# Altium PCB PCB_Control_2021-08-06.pcbdoc (part 1 of 2)
Units mil, origin at the board's own origin, x right, y up, seen from the top; angles counter-clockwise.
Board outline 4897.2 x 3916.1 mil, 2 copper layers (Top Layer, Bottom Layer); 50 components, 74 nets, 337 pads, 66 vias.
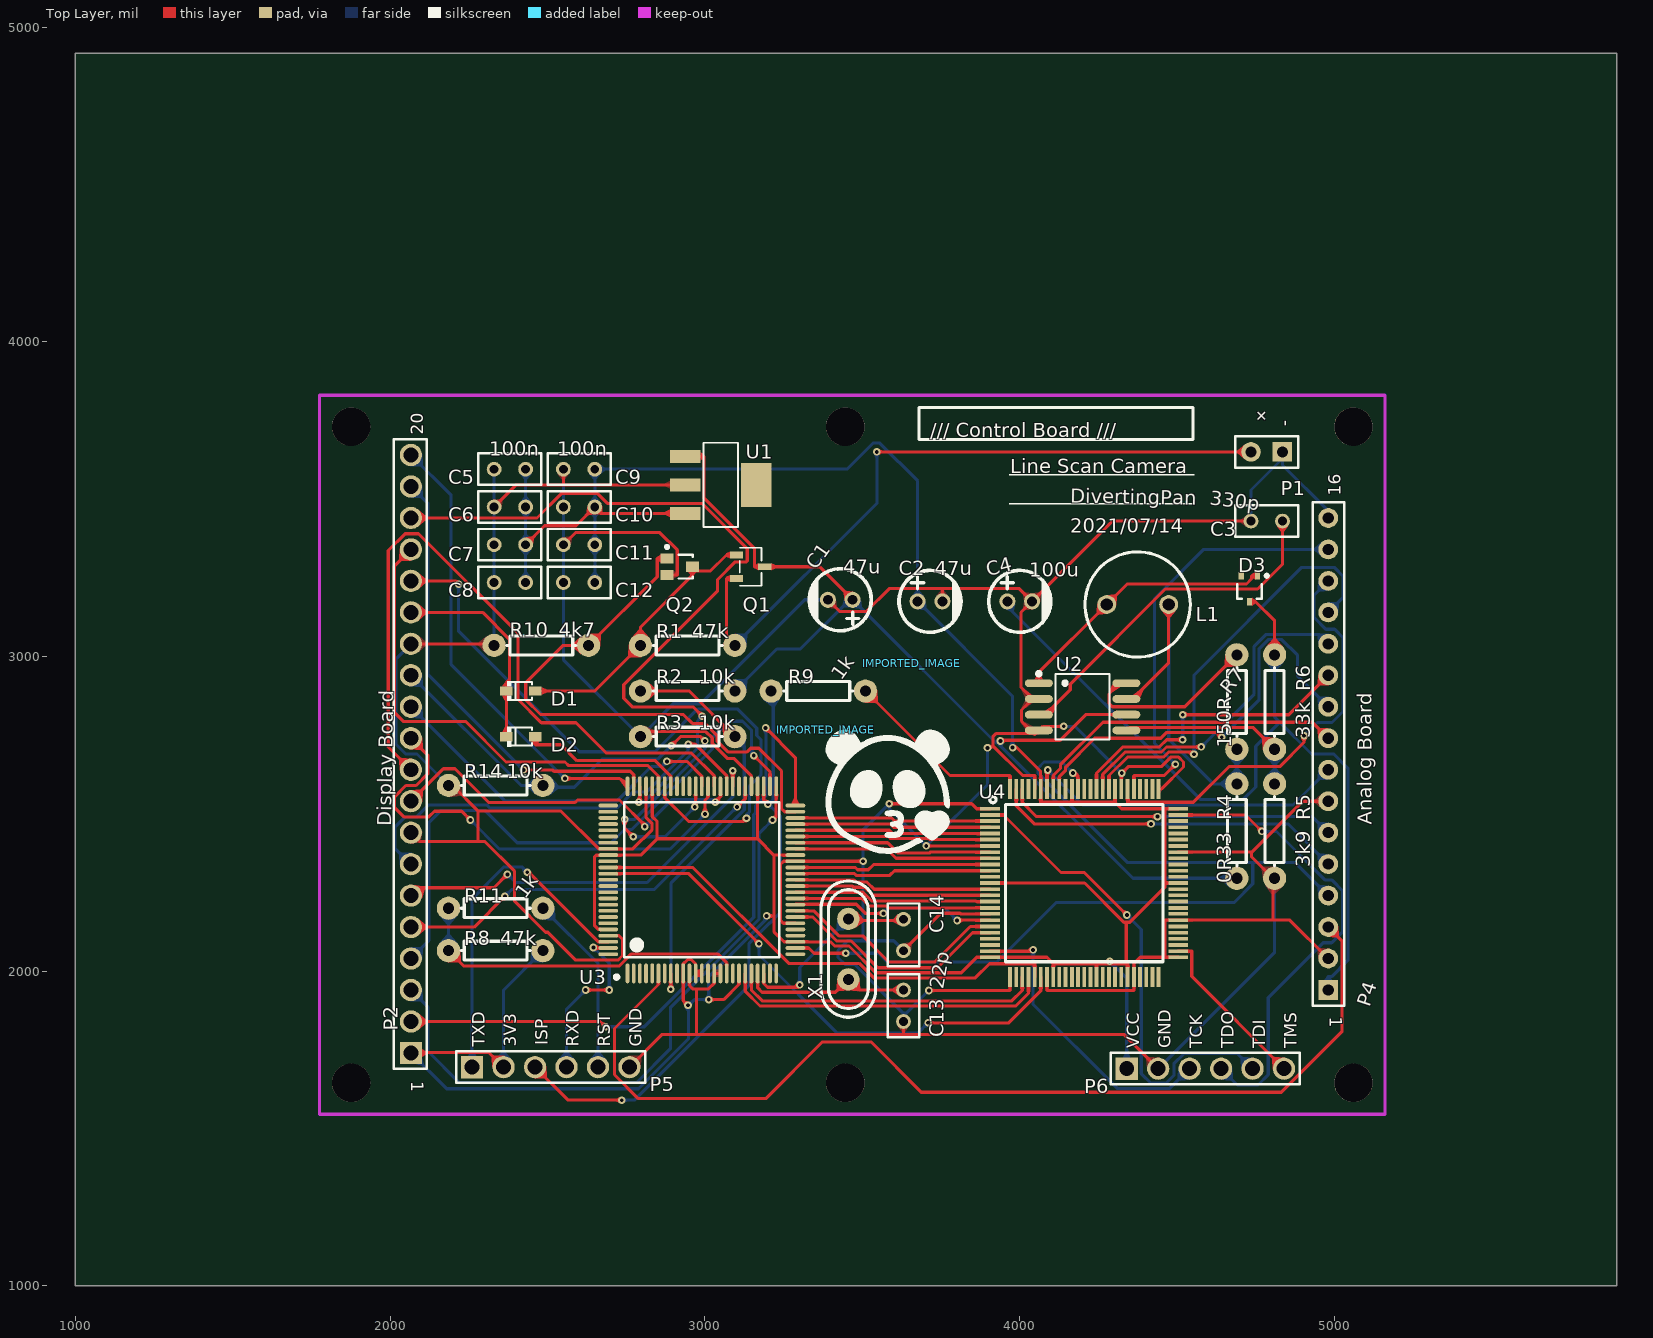
[diagram p0: Top Layer view]
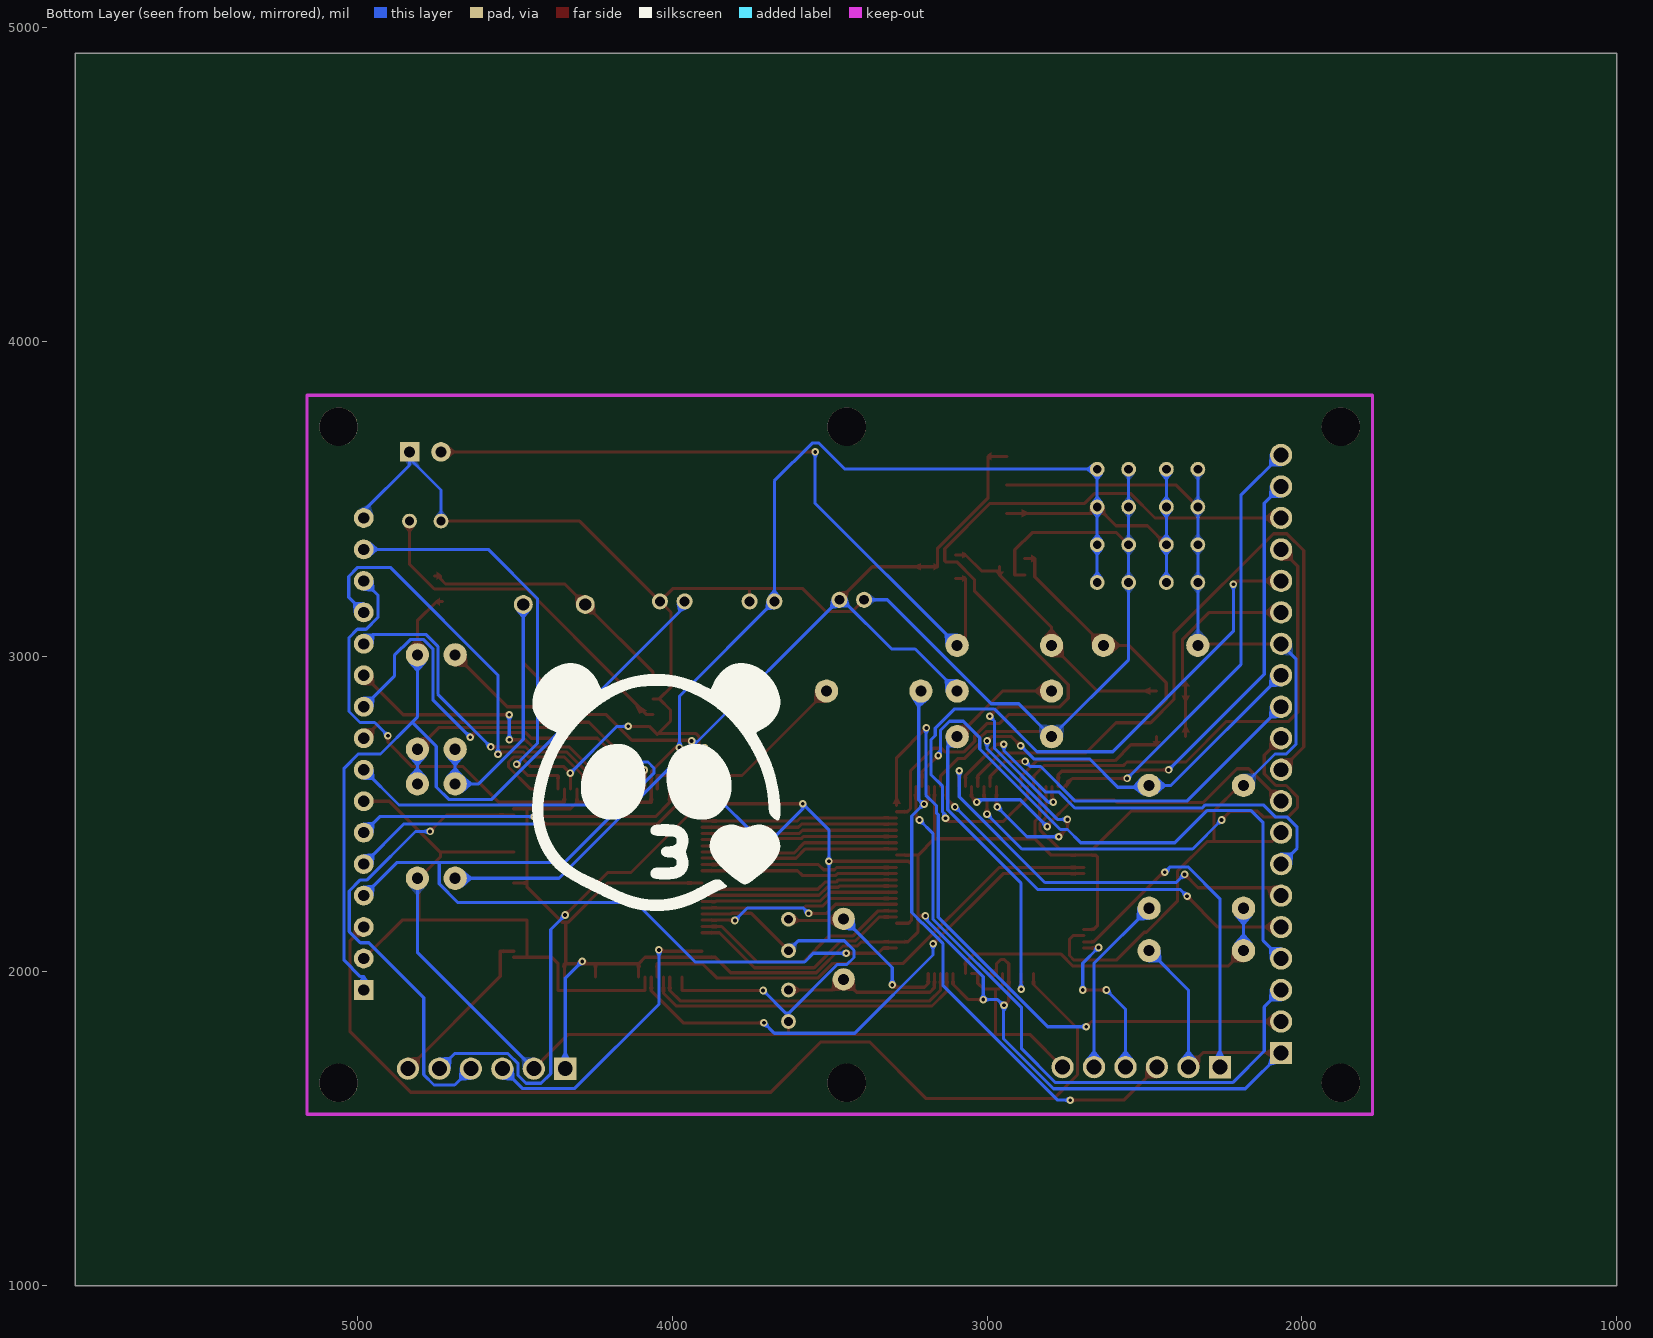
[diagram p1: Bottom Layer view, seen from below]

## Layer stack, top to bottom
Top Layer: signal copper (thickness not stored)
Dielectric: dielectric 12.6, FR-4, Dk 4.8
Bottom Layer: signal copper (thickness not stored)

## Board outline
5897.2,1000 1000,1000 1000,4916.1 5897.2,4916.1

## Components (designator, comment, footprint, x,y, rotation, side; value= is the part's Value field where it differs from the comment)
C1 "47u" CAP-TH_BD5.0-P2.00-D0.8-FD 3430.5,3180 r180 top
C2 "47u" CAP-TH_BD5.0-P2.00-D0.8-FD 3715.5,3175 r0 top
C3 "330p" RAD-0.1 4785.5,3430 r180 top
C4 "100u" CAP-TH_BD5.0-P2.00-D0.8-FD 4000.5,3175 r0 top
C5 "100n" RAD-0.1 2380.5,3595 r0 top
C6 "100n" RAD-0.1 2380.5,3475 r0 top
C7 "100n" RAD-0.1 2380.5,3355 r0 top
C8 "100n" RAD-0.1 2380.5,3235 r0 top
C9 "100n" RAD-0.1 2600.5,3595 r0 top
C10 "100n" RAD-0.1 2600.5,3475 r0 top
C11 "100n" RAD-0.1 2600.5,3355 r0 top
C12 "100n" RAD-0.1 2600.5,3235 r0 top
C13 "22p" RAD-0.1 3631.1,1890 r90 top
C14 "22p" RAD-0.1 3631.1,2115 r90 top
D1 "1SS352" SOD-323_L1.8-W1.3-LS2.5-RD 2415.5,2890 r0 top
D2 "1SS352" SOD-323_L1.8-W1.3-LS2.5-RD 2415.5,2745 r0 top
D3 "SB1003M3" -ONSC-MCPH-3_V 4730.5,3215 r270 top
IMPORTED_IMAGE "IMPORTED_IMAGE" IMPORTED_IMAGE 3657.32,2977.87 r0 top
IMPORTED_IMAGE "IMPORTED_IMAGE" IMPORTED_IMAGE 3384.02,2766.43 r0 top
L1 "100uH" IND-TH_BD8.5-P5.00-D0.6 4375.5,3165 r180 top
P1 "Battery" HDR-F-2.54_1X2 4785.5,3650 r180 top
P2 "Display Board" HDR-TH_20P-P2.54-V 2066.1,2690 r90 top
P4 "Analog Board" HDR-TH_16P-P2.54-V 4981.1,2690 r90 top
P5 "CN6BOX" HDR-TH_6P-P2.54-V 2510.5,1695 r0 top
P6 "CN6BOX" HDR-TH_6P-P2.54-V 4590.5,1690 r0 top
Q1 "NTR4101PT1G" SOT-23-3_L2.9-W1.6-P1.90-LS2.8-BR 3145.5,3285 r180 top
Q2 "RN1302" SOT-323-3_L2.0-W1.3-P1.30-LS2.1-BR 2920.5,3285 r180 top
R1 "47k" R_AXIAL-0.3 2945.5,3035 r180 top
R2 "10k" R_AXIAL-0.3 2945.5,2890 r0 top
R3 "10k" R_AXIAL-0.3 2945.5,2745 r0 top
R4 "0R33" R_AXIAL-0.3 4690.5,2445 r270 top
R5 "3k9" R_AXIAL-0.3 4810.5,2445 r270 top
R6 "33k" R_AXIAL-0.3 4810.5,2855 r270 top
R7 "150R" R_AXIAL-0.3 4690.5,2855 r90 top
R8 "47k" R_AXIAL-0.3 2335.5,2065 r180 top
R9 "1k" R_AXIAL-0.3 3360.5,2890 r180 top
R10 "4k7" R_AXIAL-0.3 2480.5,3035 r0 top
R11 "1k" R_AXIAL-0.3 2335.5,2200 r0 top
R14 "10k" R_AXIAL-0.3 2335.5,2590 r0 top
U1 "MCP1824S33" SOT-223_L6.5-W3.5-P2.30-LS7.0-BR 3050.5,3545 r180 top
U2 "NJM2374AM" SOIC-8_L5.3-W5.3-P1.27-LS8.0-BL 4200.5,2840 r270 top
U3 "LPC2368FBD100K" LQFP-100_L14.0-W14.0-P0.50-LS16.0-BL 2990.5,2290 r0 top
U4 "LC4256V-75T100C" TQFP100 4205.5,2280 r0 top
X1 "16M" HC-49S_L11.0-W4.4-P4.88 3456.1,2070 r90 top
? "" ? 5071.1,3315.05 r0 top
? "" ? 3468.6,3939.5 r0 top
? "" ? 1826.1,3943.9 r0 top
? "" ? 1700.67,2687.5 r0 top
? "" ? 1921.1,4027.05 r0 top
? "" ? 2611.1,3934.25 r0 top

## Footprints (in the part's own frame and the unit in brackets; to place one, negate y for a bottom-side part, rotate by r counter-clockwise, add the part's x,y. Pads: shape width x height; smd on the part's side, far side on the other; paste and mask are expansions set on the pad)
-ONSC-MCPH-3_V [mil]
  rect 24.5x16.5 smd: 1(-41,26) 2(-41,-26) 3(41,0)
  silkscreen extent -46,-39 32,60
CAP-TH_BD5.0-P2.00-D0.8-FD [mm]
  round 1.3 hole 0.8: 1(-1,0) 2(1,0)
  silkscreen extent -2.5,-2.5 2.5,2.5
HC-49S_L11.0-W4.4-P4.88 [mm]
  round 1.8 hole 0.9: 1(-2.44,0) 2(2.44,0)
  silkscreen extent -5.5,-2.2 5.5,2.2
HDR-F-2.54_1X2 [mil]
  rect 62x62 hole 35: 1(-50,0)
  round 62 hole 35: 2(50,0)
  silkscreen extent -100,-49 100,50
HDR-TH_6P-P2.54-V [mm]
  rect 1.8x1.8 hole 1.2: 1(-6.35,0)
  round 1.8 hole 1.2: 2(-3.81,0) 3(-1.27,0) 4(1.27,0) 5(3.81,0) 6(6.35,0)
  silkscreen extent -7.62,-1.27 7.62,1.27
HDR-TH_16P-P2.54-V [mm]
  rect 1.6x1.6 hole 0.9: 1(-19.05,0)
  round 1.6 hole 0.9: 2(-16.51,0) 3(-13.97,0) 4(-11.43,0) 5(-8.89,0) 6(-6.35,0) 7(-3.81,0) 8(-1.27,0) 9(1.27,0) 10(3.81,0) 11(6.35,0) 12(8.89,0) 13(11.43,0) 14(13.97,0) 15(16.51,0) 16(19.05,0)
  silkscreen extent -20.32,-1.27 20.32,1.27
HDR-TH_20P-P2.54-V [mm]
  rect 1.8x1.8 hole 1.2: 1(-24.13,0)
  round 1.8 hole 1.2: 2(-21.59,0) 3(-19.05,0) 4(-16.51,0) 5(-13.97,0) 6(-11.43,0) 7(-8.89,0) 8(-6.35,0) 9(-3.81,0) 10(-1.27,0) 11(1.27,0) 12(3.81,0) 13(6.35,0) 14(8.89,0) 15(11.43,0) 16(13.97,0) 17(16.51,0) 18(19.05,0) 19(21.59,0) 20(24.13,0)
  silkscreen extent -25.4,-1.27 25.4,1.4
IMPORTED_IMAGE [mil]
IND-TH_BD8.5-P5.00-D0.6 [mil]
  round 60 hole 39.37: 1(-98.43,0) 2(98.42,0)
  silkscreen extent -167,-167 167,167
LQFP-100_L14.0-W14.0-P0.50-LS16.0-BL [mm]
  oval 0.3x1.6 smd: 1(-6,-7.55) 2(-5.5,-7.55) 3(-5,-7.55) 4(-4.5,-7.55) 5(-4,-7.55) 6(-3.5,-7.55) 7(-3,-7.55) 8(-2.5,-7.55) 9(-2,-7.55) 10(-1.5,-7.55) 11(-1,-7.55) 12(-0.5,-7.55) 13(0,-7.55) 14(0.5,-7.55) 15(1,-7.55) 16(1.5,-7.55) 17(2,-7.55) 18(2.5,-7.55) 19(3,-7.55) 20(3.5,-7.55) 21(4,-7.55) 22(4.5,-7.55) 23(5,-7.55) 24(5.5,-7.55) 25(6,-7.55) 51(6,7.55) 52(5.5,7.55) 53(5,7.55) 54(4.5,7.55) 55(4,7.55) 56(3.5,7.55) 57(3,7.55) 58(2.5,7.55) 59(2,7.55) 60(1.5,7.55) 61(1,7.55) 62(0.5,7.55) 63(0,7.55) 64(-0.5,7.55) 65(-1,7.55) 66(-1.5,7.55) 67(-2,7.55) 68(-2.5,7.55) 69(-3,7.55) 70(-3.5,7.55) 71(-4,7.55) 72(-4.5,7.55) 73(-5,7.55) 74(-5.5,7.55) 75(-6,7.55)
  oval 1.6x0.3 smd: 26(7.55,-6) 27(7.55,-5.5) 28(7.55,-5) 29(7.55,-4.5) 30(7.55,-4) 31(7.55,-3.5) 32(7.55,-3) 33(7.55,-2.5) 34(7.55,-2) 35(7.55,-1.5) 36(7.55,-1) 37(7.55,-0.5) 38(7.55,0) 39(7.55,0.5) 40(7.55,1) 41(7.55,1.5) 42(7.55,2) 43(7.55,2.5) 44(7.55,3) 45(7.55,3.5) 46(7.55,4) 47(7.55,4.5) 48(7.55,5) 49(7.55,5.5) 50(7.55,6) 76(-7.55,6) 77(-7.55,5.5) 78(-7.55,5) 79(-7.55,4.5) 80(-7.55,4) 81(-7.55,3.5) 82(-7.55,3) 83(-7.55,2.5) 84(-7.55,2) 85(-7.55,1.5) 86(-7.55,1) 87(-7.55,0.5) 88(-7.55,0) 89(-7.55,-0.5) 90(-7.55,-1) 91(-7.55,-1.5) 92(-7.55,-2) 93(-7.55,-2.5) 94(-7.55,-3) 95(-7.55,-3.5) 96(-7.55,-4) 97(-7.55,-4.5) 98(-7.55,-5) 99(-7.55,-5.5) 100(-7.55,-6)
  silkscreen extent -7.03,-8 6.25,6.25
R_AXIAL-0.3 [mil]
  round 74 hole 35.4: 1(-150,0) 2(150,0)
  silkscreen extent -110,-30 110,30
RAD-0.1 [mil]
  round 47 hole 28: 1(-50,0) 2(50,0)
  silkscreen extent -100,-50 100,50
SOD-323_L1.8-W1.3-LS2.5-RD [mm]
  rect 1x0.75 smd: 1(-1.173,0) 2(1.173,0)
  silkscreen extent -1.08,-0.8 0.9,0.8
SOIC-8_L5.3-W5.3-P1.27-LS8.0-BL [mm]
  oval 0.63x2.25 smd: 1(-1.905,-3.53) 2(-0.635,-3.53) 3(0.635,-3.53) 4(1.905,-3.53) 5(1.905,3.53) 6(0.635,3.53) 7(-0.635,3.53) 8(-1.905,3.53)
  silkscreen extent -2.82,-3.68 2.64,2.18
SOT-23-3_L2.9-W1.6-P1.90-LS2.8-BR [mm]
  rect 1.07x0.532 smd: 1(1.135,-0.95) 2(1.135,0.95) 3(-1.135,0)
  silkscreen extent -0.88,-1.54 0.88,1.54
SOT-223_L6.5-W3.5-P2.30-LS7.0-BR [mm]
  rect 2.465x1.05 smd: 1(2.858,-2.3) 2(2.857,0) 3(2.857,2.3)
  rect 2.465x3.54 smd: 4(-2.857,0)
  silkscreen extent -1.4,-3.4 1.4,3.4
SOT-323-3_L2.0-W1.3-P1.30-LS2.1-BR [mil]
  rect 41.5x32.5 smd: 1(40,-26) 2(40,26) 3(-40,0)
  silkscreen extent -40,-68 45,37
TQFP100 [mil]
  rect 63x12 smd: 1(-299,236) 2(-299,216) 3(-299,197) 4(-299,177) 5(-299,157) 6(-299,138) 7(-299,118) 8(-299,98) 9(-299,79) 10(-299,59) 11(-299,39) 12(-299,20) 13(-299,0) 14(-299,-20) 15(-299,-39) 16(-299,-59) 17(-299,-79) 18(-299,-98) 19(-299,-118) 20(-299,-138) 21(-299,-158) 22(-299,-177) 23(-299,-197) 24(-299,-217) 25(-299,-236) 51(299,-236) 52(299,-217) 53(299,-197) 54(299,-177) 55(299,-158) 56(299,-138) 57(299,-118) 58(299,-98) 59(299,-79) 60(299,-59) 61(299,-39) 62(299,-20) 63(299,0) 64(299,20) 65(299,39) 66(299,59) 67(299,79) 68(299,98) 69(299,118) 70(299,138) 71(299,157) 72(299,177) 73(299,197) 74(299,216) 75(299,236)
  rect 12x63 smd: 26(-236,-299) 27(-216,-299) 28(-197,-299) 29(-177,-299) 30(-157,-299) 31(-138,-299) 32(-118,-299) 33(-98,-299) 34(-79,-299) 35(-59,-299) 36(-39,-299) 37(-20,-299) 38(0,-299) 39(20,-299) 40(39,-299) 41(59,-299) 42(79,-299) 43(98,-299) 44(118,-299) 45(138,-299) 46(158,-299) 47(177,-299) 48(197,-299) 49(217,-299) 50(236,-299) 76(236,299) 77(217,299) 78(197,299) 79(177,299) 80(158,299) 81(138,299) 82(118,299) 83(98,299) 84(79,299) 85(59,299) 86(39,299) 87(20,299) 88(0,299) 89(-20,299) 90(-39,299) 91(-59,299) 92(-79,299) 93(-98,299) 94(-118,299) 95(-138,299) 96(-157,299) 97(-177,299) 98(-197,299) 99(-216,299) 100(-236,299)
  silkscreen extent -300,-250 250,275
? [mil]

## Free pads (board coordinates)
  round 122.05 hole 122.05 unplated: ""(1876.1,1645) ""(1876.1,3730) ""(3446.1,1645) ""(3446.1,3730) ""(5061.1,1645) ""(5061.1,3730)

## Via types
v1: diameter 24.02, hole 12.01, Top Layer to Bottom Layer, 66 vias

## Nets (pads, with @x,y where several pads share a name; then routed paths per layer and width w, separated by ;. In a path a pad name is that pad's centre, name@x,y a point inside that pad or via, vN(x,y) a via of type N, cw(c..) or ccw(c..) an arc to the next point about the centre after c; other vN are vias at no path point)
D1_1: D1.1 D2.1 P2.15 | length 661.9
  Top Layer w10: P2.15@2066.1,3140 2293.89,3140 2378.92,3054.97 2378.92,2925.41 2369.34,2915.83 ; D2.1@2369.34,2745 D1.1@2369.34,2890 2369.3,2915.8
GND: C1.2 C2.2 C3.2 C4.2 C5.1 C6.1 C7.1 C8.1 C9.1 C10.1 C11.1 C12.1 C13.1 C14.1 P1.1 P2.8 P2.14 P4.2 P4.7 P4.16 P5.6 P6.2 Q2.2 R3.1 R5.2 R10.1 R14.1 U1.2 U2.2 U2.4 U3.11 U3.15 U3.16 U3.31 U3.41 U3.55 U3.72 U3.83 U3.97 U4.1 U4.7 U4.18 U4.26 U4.32 U4.46 U4.51 U4.57 U4.68 U4.76 U4.82 U4.96 | length 18788.4
  Top Layer w10: P2.8@2066.1,2440 2094.22,2411.88 2279.72,2411.88 ; P2.14@2066.1,3040 2325.5,3040 R10.1@2330.5,3035 ; R14.1@2185.5,2590 2198.16,2590 2279.72,2508.44 2279.72,2411.88 ; 2279.7,2508.4 2543,2508.4 2663,2388.4 U3.83@2693.26,2388.43 2771.2,2388.4 2832.4,2449.6 2832.4,2468.8 2813.4,2487.8 2813.4,2587.2 U3.72@2813.33,2587.24 ; C6.1@2330.5,3475 2400.5,3545 2550.5,3545 ; C11.1@2550.5,3355 2588.91,3393.41 2857.27,3393.41 2912.32,3338.36 2912.32,3259 Q2.2@2880.5,3259 ; C9.1@2550.5,3595 2550.5,3545 ; U3.97@2693.26,2112.83 2727.3,2112.8 2738.6,2101.4 2738.6,2049.6 2724,2034.9 2589.7,2034.9 2500.9,2123.7 2493.7,2123.7 2395.7,2221.6 2395.7,2317 2300.8,2411.9 2279.7,2411.9 ; P5.6@2760.5,1695 2864.63,1799.13 2973.17,1799.13 ; R3.1@2795.5,2745 2811.6,2761.1 3003.4,2761.1 3023.4,2741 3023.4,2724 3071.3,2676.1 3092.3,2676.1 3148,2620.5 U3.55@3147.98,2587.24 ; U1.2@2938,3545 2550.5,3545 ; U3.11@2951.13,1992.76 2951.1,1954 2961.8,1943.4 2973.2,1943.4 3011.5,1943.4 3029.9,1961.7 U3.15@3029.87,1992.76 U3.16@3049.56,1992.76 ; 2973.17,1943.38 2973.17,1799.13 ; U3.31@3287.74,2152.2 3249.7,2152.2 3240.3,2161.6 3240.3,2338.6 3250.7,2349.1 U3.41@3287.74,2349.06 v1(3502.86,2349.06) ; C1.2@3391.13,3180 3427.93,3143.2 3513.78,3143.2 3586.13,3215.55 3754.87,3215.55 ; v1(3586.11,2532.06) 3847.87,2532.06 3863.93,2516 ; C13.1@3631.1,1840 3631.1,1799.13 ; C14.1@3631.1,2065 3750.1,2184 3811.3,2184 3813.2,2182 U4.18@3906.5,2182 ; v1(3703.53,2398) U4.7@3906.5,2398 ; v1(3711.95,1938.43) 3969.5,1938.43 ; C2.2@3754.87,3175 3754.87,3215.55 ; 3863.9,2516 U4.1@3906.5,2516 ; v1(3898.15,2709.21) 3908.22,2709.21 3915.29,2716.28 ; 3969.5,1938.4 U4.26@3969.5,1981 ; C4.2@4039.87,3175 4004.7,3139.9 4004.7,2901.8 U2.2@4041.5,2865 ; U4.96@4048.5,2579 4048.5,2621.6 ; 4048.5,2621.57 4010,2621.57 3915.29,2716.28 ; U2.2@4061.52,2865 U2.2@4041.51,2865 ; 4087.5,1938.4 U4.32@4087.5,1981 ; 4087.5,1938.43 4363.5,1938.43 ; v1(4140.5,2777.81) 4074.3,2777.8 U2.4@4061.52,2765 4048.5,2752 ; U4.82@4323.5,2579 4323.5,2628 v1(4324.8,2629.27) 4345.3,2649.8 4450.1,2649.8 4480.4,2680.1 4505.4,2680.1 4521.1,2664.4 4521.1,2648.7 4451.5,2579 U4.76@4441.5,2579 ; 4363.5,1938.4 U4.46@4363.5,1981 4363.5,2023.6 ; 4363.5,2023.57 4383.93,2044 4461.93,2044 4461.93,2162 ; P6.2@4440.5,1690 4331.37,1799.13 3631.1,1799.13 ; 4461.9,2044 U4.51@4504.5,2044 ; 4461.9,2162 U4.57@4487.2,2162 ; U4.57@4487.24,2162 U4.57@4504.5,2162 4805.3,2162 ; U4.68@4504.5,2378 4737.5,2378 ; C3.2@4735.5,3430 4294.87,3430 C4.2@4039.87,3175 3999.32,3215.55 3754.87,3215.55 ; R5.2@4810.5,2295 R5.2@4805.26,2295 ; P4.2@4981.1,2040 4859.1,2162 4805.26,2162 R5.2@4805.26,2295 ; P4.7@4981.1,2540 4899.48,2540 4737.48,2378 ; 2973.17,1799.13 3631.1,1799.13 ; 3915.3,2716.3 3915.3,2745.1 3924.9,2754.7 4045.8,2754.7 4048.5,2752 ; U2.2@4041.5,2865 4006.1,2829.6 4006.1,2794.3 4048.5,2752 ; 4737.48,2378 4737.48,2362.78 R5.2@4805.26,2295
  Bottom Layer w10: P2.14@2066.1,3040 2018.96,2992.86 2018.96,2720.22 2049.18,2690 2085.5,2690 R14.1@2185.5,2590 ; R10.1@2330.5,3035 C8.1@2330.5,3235 C7.1@2330.5,3355 C6.1@2330.5,3475 C5.1@2330.5,3595 ; C9.1@2550.5,3595 C10.1@2550.5,3475 C11.1@2550.5,3355 C12.1@2550.5,3235 2550.5,2990 R3.1@2795.5,2745 2899.9,2849.4 2986.91,2849.4 3317.51,3180 C1.2@3391.13,3180 ; C13.1@3631.1,1840 3631.1,1866.16 ; C14.1@3631.1,2065 3599.79,2096.31 3502.86,2096.31 ; v1(3711.95,1938.43) 3639.68,1866.16 3631.1,1866.16 ; v1(3898.15,2709.21) 3898.15,2592.62 v1(3703.53,2398) 3586.11,2515.42 v1(3586.11,2532.06) 3502.86,2448.81 v1(3502.86,2349.06) 3502.86,2096.31 ; v1(4140.5,2777.81) 4176.26,2777.81 v1(4324.8,2629.27) ; P6.2@4440.5,1690 4810.5,2060 R5.2@4810.5,2295 ; C3.2@4735.5,3430 4735.5,3529 4835.5,3629 4835.5,3607.9 ; 4835.5,3607.93 4981.1,3462.33 P4.16@4981.1,3440 ; P1.1@4835.5,3628.97 P1.1@4835.5,3650 ; 3502.86,2096.31 3453.6,2096.31 3423.31,2066.02 3423.31,2043.47 3445.85,2020.93 3476.33,2020.93 3631.1,1866.16
P1_2: P1.2 Q1.2 R1.1 | length 2246.6
  Top Layer w10: R1.1@3095.5,3035 3068.69,3061.81 3068.69,3247.6 Q1.2@3100.82,3247.6 ; v1(3546.61,3650) P1.2@4735.5,3650
  Bottom Layer w10: R1.1@3095.5,3035 3546.61,3486.11 v1(3546.61,3650)
P5_5: P5.5 R11.2 | length 577.5
  Bottom Layer w10: R11.2@2485.5,2200 2660.5,2025 P5.5@2660.5,1695
Q1_1: D1.2 Q1.1 Q2.3 R1.2 | length 873.6
  Top Layer w10: D1.2@2461.66,2890 2650.5,2890 R1.2@2795.5,3035 2795.5,3092.68 2960.5,3257.68 2960.5,3271.3 3017.6,3271.3 3068.7,3322.4 Q1.1@3100.82,3322.4 ; Q2.3@2960.5,3271.34 Q2.3@2960.5,3285
Q1_3: C1.1 Q1.3 R2.2 R4.2 U1.1 U2.6 | length 3358.5
  Top Layer w10: U1.1@2938,3635.5 2997.6,3635.5 ; 2997.59,3635.55 2997.59,3502.45 3158.06,3341.98 3158.06,3285 ; 3158.1,3285 Q1.3@3174.1,3285 ; Q1.3@3174.13,3285 Q1.3@3190.19,3285 3364.9,3285 C1.1@3469.87,3180 ; v1(3939.22,2731.22) 3941.6,2733.6 4128.9,2733.6 4210.3,2815 U2.6@4339.48,2815
  Bottom Layer w10: R2.2@3095.5,2890 3229.07,3023.57 3303.64,3023.57 3460.07,3180 C1.1@3469.87,3180 3923.57,2726.3 v1@3934.3,2726.3 ; v1(3939.22,2731.22) v1@3934.3,2726.3 ; R4.2@4690.5,2295 4360.6,2295 3934.3,2721.3 v1@3934.3,2726.3
R6_1: C4.1 D3.3 P4.1 R6.1 | length 2761.5
  Top Layer w10: D3.3@4730.5,3174 4749.8,3174 4810.5,3113.32 R6.1@4810.5,3005
  Bottom Layer w10: C4.1@3961.13,3175 3961.13,3158.72 4574.07,2545.78 4711.27,2545.78 4750.51,2585.02 4750.51,2714.25 4826.92,2790.66 ; R6.1@4810.5,3005 4810.5,2807.08 4826.92,2790.66 ; P4.1@4981.1,1940 4981.1,1982.6 ; 4981.09,1982.57 4991.73,1982.57 5043.34,2034.18 5043.34,2645.05 4998.39,2690 4927.58,2690 4826.92,2790.66
U2_1: D3.1 L1.2 U2.1 | length 862.1
  Top Layer w10: U2.1@4061.52,2915 4061.5,2949.4 L1.2@4277.08,3165 4342.32,3230.24 4721.08,3230.24 4737.18,3246.34 4737.18,3256 D3.1@4756.5,3256
U2_3: C3.1 U2.3 | length 1119.3
  Top Layer w10: U2.3@4061.52,2815 4082.1,2815 4161.2,2894.2 4161.2,2911.7 4463.6,3214.1 4756.7,3214.1 4835.5,3293 C3.1@4835.5,3430
U2_5: R5.1 R6.2 U2.5 | length 613.8
  Top Layer w10: U2.5@4339.48,2765 4349,2774.6 4740.9,2774.6 R6.2@4810.5,2705
  Bottom Layer w10: R5.1@4810.5,2595 R6.2@4810.5,2705
U2_7: L1.1 R4.1 R7.1 U2.7 | length 1180.7
  Top Layer w10: U2.7@4339.48,2865 4359.3,2865 4473.9,2979.6 L1.1@4473.93,3165
  Bottom Layer w10: L1.1@4473.93,3165 4473.93,2736.97 4615.9,2595 R4.1@4690.5,2595 R7.1@4690.5,2705
U2_8: R7.2 U2.8 | length 578.4
  Top Layer w10: U2.8@4339.48,2915 4318.7,2915 4284.1,2880.4 4284.1,2851 4295.1,2840 4525.5,2840 R7.2@4690.5,3005
U3_6: P4.3 U3.6 | length 3293.7
  Top Layer w10: U3.6@2852.7,1992.76 2852.7,1957.7 2712.8,1817.8 2712.8,1671.1 2788.9,1595 3193.8,1595 3373.8,1775 3527.9,1775 3687.9,1615 4832,1615 5024.2,1807.2 5024.2,2096.9 P4.3@4981.1,2140
U3_8: R2.1 R3.2 U3.8 | length 1322.7
  Top Layer w10: R2.1@2795.5,2890 2950.5,2890 R3.2@3095.5,2745 ; v1(2892.08,1942.13) U3.8@2892.07,1992.76
  Bottom Layer w10: v1(2892.08,1942.13) 2892.08,2278.91 3125.49,2512.32 3125.49,2715.01 R3.2@3095.5,2745
U3_17: R8.2 R11.1 U3.17 | length 1100
  Top Layer w10: R8.2@2185.5,2065 2234.2,2016.3 2728.1,2016.3 2766.5,2054.7 3040.8,2054.7 3069.2,2026.2 U3.17@3069.24,1992.76
  Bottom Layer w10: R8.2@2185.5,2065 R11.1@2185.5,2200
U3_20: U3.20 U4.29 | length 1044.2
  Top Layer w10: U3.20@3128.3,1992.76 3128.3,1936.4 3175.5,1889.2 3987.9,1889.2 4028.5,1929.8 U4.29@4028.5,1981
U3_21: U3.21 U4.28 | length 984
  Top Layer w10: U3.21@3147.98,1992.76 3148,1940 3182.7,1905.3 3975.4,1905.3 4008.5,1938.4 U4.28@4008.5,1981
U3_27: P4.4 U3.27 U4.89 | length 2936.4
  Top Layer w10: U3.27@3287.74,2073.46 3330.3,2073.5 3347.1,2056.7 v1(3447.99,2056.69) ; v1@4169.65,2629.64 4177.72,2621.57 4185.5,2621.57 ; U4.89@4185.5,2579 4185.5,2621.6
  Bottom Layer w10: v1(3447.99,2056.69) 3552.51,2056.69 3580.24,2028.96 3927.5,2028.96 4116.05,2217.51 4681.39,2217.51 4741.07,2277.19 4741.07,2344.89 ; v1@4169.65,2629.64 4134.94,2664.35 4077.94,2664.35 4059.22,2645.63 4059.22,2628.97 4343.3,2344.89 4741.07,2344.89 ; P4.4@4981.1,2240 4876.21,2344.89 4741.07,2344.89
  other v1: 4169.65,2629.64
U3_32: U3.32 U4.21 | length 731.6
  Top Layer w10: U3.32@3287.74,2171.89 3343.4,2171.9 3419.4,2095.9 3464.8,2095.9 3549.8,2010.8 3739.4,2010.8 3850.6,2122 U4.21@3906.5,2122
U3_33: U3.33 U4.20 | length 733.1
  Top Layer w10: U3.33@3287.74,2191.57 3346.5,2191.6 3426.1,2112 3502,2112 3585,2028.9 3730.8,2028.9 3843.9,2142 U4.20@3906.5,2142
U3_34: U3.34 U4.19 | length 655.4
  Top Layer w10: U3.34@3287.74,2211.26 3289,2212.6 3481,2212.6 3510,2183.5 v1(3567.5,2183.53) ; v1(3801.68,2160.9) 3802.8,2162 U4.19@3906.5,2162
  Bottom Layer w10: v1(3567.5,2183.53) 3584.66,2200.69 3761.89,2200.69 v1(3801.68,2160.9)
U3_35: U3.35 U4.17 | length 631.2
  Top Layer w10: U3.35@3287.74,2230.94 3499,2230.9 3523.3,2206.6 3577.1,2206.6 3582.7,2201 U4.17@3906.5,2201
U3_36: U3.36 U4.16 | length 631.1
  Top Layer w10: U3.36@3287.74,2250.63 3502.1,2250.6 3530,2222.7 3862.2,2222.7 3863.9,2221 U4.16@3906.5,2221
U3_37: U3.37 U4.15 | length 630.9
  Top Layer w10: U3.37@3287.74,2270.32 3469.7,2270.3 3473.3,2266.7 3508.7,2266.7 3534.5,2241 U4.15@3906.5,2241
U3_38: U3.38 U4.14 | length 631.2
  Top Layer w10: U3.38@3287.74,2290 3472.8,2290 3480,2282.8 3515.4,2282.8 3538.2,2260 U4.14@3906.5,2260
U3_39: U3.39 U4.11 | length 627.1
  Top Layer w10: U3.39@3287.74,2309.69 3475.8,2309.7 3481.2,2304.3 3587.8,2304.3 3602.6,2319 U4.11@3906.5,2319
U3_40: U3.40 U4.10 | length 628.7
  Top Layer w10: U3.40@3287.74,2329.37 3478.9,2329.4 3486.1,2322.2 3519.6,2322.2 3536.4,2339 U4.10@3906.5,2339
U3_43: U3.43 U4.9 | length 631.2
  Top Layer w10: U3.43@3287.74,2388.43 3577.7,2388.4 3607.3,2358.8 3863.8,2358.8 3863.9,2359 U4.9@3906.5,2359
U3_44: U3.44 U4.8 | length 633.8
  Top Layer w10: U3.44@3287.74,2408.11 3580.8,2408.1 3614,2374.9 3713.1,2374.9 3716.2,2378 U4.8@3906.5,2378
U3_45: U3.45 U4.6 | length 622.9
  Top Layer w10: U3.45@3287.74,2427.8 3583.9,2427.8 3590.6,2421.1 3713.1,2421.1 3716.2,2418 U4.6@3906.5,2418
U3_46: U3.46 U4.5 | length 623.2
  Top Layer w10: U3.46@3287.74,2447.48 3587,2447.5 3597.3,2437.2 3863.8,2437.2 3863.9,2437 U4.5@3906.5,2437
U3_47: U3.47 U4.4 | length 623
  Top Layer w10: U3.47@3287.74,2467.17 3590.1,2467.2 3600.3,2457 U4.4@3906.5,2457
U3_48: U3.48 U4.3 | length 622.9
  Top Layer w10: U3.48@3287.7,2486.9 3593.2,2486.9 3603,2477 U4.3@3906.5,2477
U3_49: Q2.1 R10.2 U3.49 | length 1794.3
  Top Layer w10: Q2.1@2880.5,3311 2848.7,3311 2848.68,3253.18 R10.2@2630.5,3035 2550.1,3035 2430.9,2915.8 2430.9,2862.6 2477.9,2815.6 2931.8,2815.6 2960.3,2787.1 3000.1,2787.1 3039.5,2747.7 3039.5,2730.6 3073.4,2696.7 3134.5,2696.7 3145.9,2708.1 3171.9,2708.1 3243.7,2636.4 3243.7,2516.5 3253.7,2506.5 U3.49@3287.74,2506.54
U3_50: P2.2 U3.50 | length 2145
  Top Layer w10: P2.2@2066.1,1840 2668.62,1840 v1(2685.49,1823.13) ; v1(3193.11,2772.98) 3287.7,2678.3 U3.50@3287.74,2526.22
  Bottom Layer w10: v1(2685.49,1823.13) 2807.3,1823.13 3155.45,2171.28 3155.45,2496.76 3161.54,2502.85 3161.54,2526.1 3194.61,2559.17 3194.61,2771.48 v1(3193.11,2772.98)
U3_51: P2.3 U3.51 | length 2046.3
  Top Layer w10: v1(3214.98,2480.16) 3226.7,2491.9 U3.51@3226.72,2587.24
  Bottom Layer w10: P2.3@2066.1,1940 2119.59,1886.51 2119.59,1746.18 2220.11,1645.66 2783.03,1645.66 2890.43,1753.06 2890.43,1883.49 3172.64,2165.7 3172.64,2437.82 v1(3214.98,2480.16)
U3_52: P2.4 U3.52 | length 1933.5
  Top Layer w10: v1(3155.43,2685.07) 3207,2633.5 U3.52@3207.04,2587.24
  Bottom Layer w10: P2.4@2066.1,2040 2123.12,2097.02 2123.12,2471.74 2161.38,2510 2301.91,2510 2404.1,2407.81 2702.54,2407.81 2744.81,2450.08 2767.57,2450.08 3023.43,2705.94 3023.43,2741.11 3076.23,2793.91 3119.64,2793.91 3148.77,2764.78 3148.77,2691.73 v1(3155.43,2685.07)
U3_53: P5.3 R9.2 U3.53 | length 1941
  Top Layer w10: P5.3@2460.5,1695 2565.5,1590 v1(2736.1,1590) ; U3.53@3187.35,2587.24 3187.4,2543.6 v1(3200.34,2530.63)
  Bottom Layer w10: v1(2736.1,1590) 2775.93,1590 3140.62,1954.69 3140.62,2088.16 3204.71,2152.25 3205.87,2152.25 3239.87,2186.25 3239.87,2492.94 v1@3203.18,2529.63 ; v1(3200.34,2530.63) 3201.34,2529.63 v1@3203.18,2529.63 ; R9.2@3210.5,2890 3217.48,2883.02 3217.48,2543.93 v1@3203.18,2529.63
U3_56: P2.5 U3.56 | length 1270.5
  Top Layer w10: P2.5@2066.1,2140 2266.76,2140 v1(2364.69,2237.93) ; v1(3102.41,2521.89) 3128.3,2547.8 U3.56@3128.3,2587.24
  Bottom Layer w10: v1(2364.69,2237.93) 2386.06,2259.3 2839.82,2259.3 v1(3102.41,2521.89)
U3_58: P2.6 U3.58 | length 1306.9
  Top Layer w10: P2.6@2066.1,2240 2091.1,2265 2330.28,2265 v1(2372.66,2307.38) ; U3.58@3088.93,2587.24 v1(3088.93,2636.81)
  Bottom Layer w10: v1(2372.66,2307.38) 2398.62,2281.42 2816.48,2281.42 3088.93,2553.87 v1(3088.93,2636.81)
U3_59: P2.7 U3.59 | length 1396.3
  Top Layer w10: v1(2947.02,2720.93) 2969.3,2720.9 3069.2,2621 U3.59@3069.24,2587.24
  Bottom Layer w10: P2.7@2066.1,2340 2015.14,2390.96 2015.14,2456.99 2048.15,2490 2084.57,2490 2122.73,2528.16 2306.51,2528.16 2316.14,2518.53 2721.18,2518.53 2772.13,2569.48 2815.42,2569.48 2947.02,2701.08 v1(2947.02,2720.93)
U3_60: P2.9 U3.60 | length 1189.6
  Top Layer w10: P2.9@2066.1,2540 2169.09,2642.99 2206.06,2642.99 2312.75,2536.3 2587.83,2536.3 2595.23,2543.7 2728.92,2543.7 2809.35,2463.27 v1(2809.35,2459.21) ; v1(3033.14,2537.31) 3049.6,2553.7 U3.60@3049.56,2587.24
  Bottom Layer w10: v1(2809.35,2459.21) 2894.84,2544.7 3025.75,2544.7 v1(3033.14,2537.31)
U3_61: P2.10 U3.61 | length 2259.6
  Top Layer w10: P2.10@2066.1,2640 1993.9,2712.2 1993.9,3336.5 2047.5,3390 2090,3390 2406.6,3073.4 2406.6,2863.3 2480.5,2789.4 2590.7,2789.4 2687,2693.1 2957.3,2693.1 3029.9,2620.5 U3.61@3029.87,2587.24
U3_62: P2.11 U3.62 | length 1499
  Top Layer w10: P2.11@2066.1,2740 2119.59,2686.51 2119.59,2627.09 2082.5,2590 2050.16,2590 2014.35,2554.19 2014.35,2519.39 2043.74,2490 2122.76,2490 2140.84,2508.08 2227.37,2508.08 v1(2255.24,2480.21) ; v1(3000.56,2498.94) 3000.6,2543.4 3010.2,2553 U3.62@3010.19,2587.24
  Bottom Layer w10: v1(2255.24,2480.21) 2347.22,2388.23 2889.85,2388.23 v1(3000.56,2498.94)
U3_63: P2.12 U3.63 | length 1152.4
  Top Layer w10: v1(2879.54,2666.25) 2943.7,2666.2 2990.5,2619.5 U3.63@2990.5,2587.24
  Bottom Layer w10: P2.12@2066.1,2840 2365.82,2540.28 2720.17,2540.28 2830.05,2650.16 2863.45,2650.16 v1(2879.54,2666.25)
U3_64: P2.13 R14.2 U3.64 | length 1895.5
  Top Layer w10: v1(2744.98,2482.09) 2744.98,2454.43 v1(2772.42,2426.99) ; v1(2893.86,2716.17) 2922.69,2745 2986.79,2745 v1(3000.35,2731.44) ; v1(2967.92,2521.62) 2970.8,2524.5 U3.64@2970.82,2587.24
  Bottom Layer w10: P2.13@2066.1,2940 2416.1,2590 R14.2@2485.5,2590 2491.23,2584.27 2585,2584.27 2675.02,2674.29 2851.98,2674.29 v1(2893.86,2716.17) ; v1(2744.98,2482.09) 2776.82,2482.09 3000.35,2705.62 v1(3000.35,2731.44) ; v1(2772.42,2426.99) 2873.29,2426.99 v1(2967.92,2521.62)
U3_68: D2.2 U3.68 | length 529.7
  Top Layer w10: D2.2@2461.66,2745 2461.7,2719.2 2543.3,2719.2 2593.4,2669 2842.3,2669 2892.1,2619.3 U3.68@2892.07,2587.24
U3_69: P2.16 U3.69 | length 2135.2
  Top Layer w10: P2.16@2066.1,3240 2207.34,3240 v1(2217.69,3229.65) ; U3.69@2872.39,2587.24 2872.4,2551.5 2948,2475.9 3122.4,2475.9 v1(3132.36,2485.78)
  Bottom Layer w10: v1(2217.69,3229.65) 2217.69,3079.82 2600.59,2696.92 2841.61,2696.92 2978,2833.31 3103.11,2833.31 3164.86,2771.56 3164.86,2748.8 3178.52,2735.14 3178.52,2623.95 3141.58,2587.01 3141.58,2505.65 3132.36,2496.43 v1(3132.36,2485.78)
U3_70: P2.17 U3.70 | length 1495.8
  Top Layer w10: P2.17@2066.1,3340 2012.9,3286.8 2012.9,2822.5 2041.9,2793.5 2239.6,2793.5 2368.4,2664.6 2555.9,2664.6 2567.6,2652.9 2819.4,2652.9 2852.7,2619.6 U3.70@2852.7,2587.24
U3_73: P2.18 U3.73 | length 2522.5
  Top Layer w10: P2.18@2066.1,3440 2466.6,3440 2543.84,3517.24 2659.24,3517.24 2690.29,3486.19 2991.1,3486.19 3134.84,3342.45 3134.84,3303.38 3131.91,3300.45 3096.84,3300.45 3040.81,3244.42 3040.81,3208.32 2742.36,2909.87 2742.36,2866.52 2769.11,2839.77 2962.5,2839.77 v1(2992.04,2810.23) ; v1(2790.32,2536.97) 2793.6,2540.3 U3.73@2793.65,2587.24
  Bottom Layer w10: v1(2790.32,2536.97) 2805.67,2536.97 2976.75,2708.05 2976.75,2794.94 v1(2992.04,2810.23)
U3_74: P2.19 U3.74 | length 1442.6
  Top Layer w10: v1(2423.4,2639.49) 2516.1,2639.5 2520.2,2635.3 2763.1,2635.3 2774,2624.5 U3.74@2773.96,2587.24
  Bottom Layer w10: P2.19@2066.1,3540 2119.59,3486.51 2119.59,2943.3 v1(2423.4,2639.49)
U3_75: P2.20 U3.75 | length 1439.7
  Top Layer w10: v1(2555.27,2612.24) 2729.3,2612.2 U3.75@2754.28,2587.24
  Bottom Layer w10: P2.20@2066.1,3640 2193.71,3512.39 2193.71,2973.8 v1(2555.27,2612.24)
U3_86: U3.86 U4.30 | length 1561.8
  Top Layer w10: U3.86@2693.26,2329.37 2962.2,2329.4 3266.9,2024.7 3490.4,2024.7 3536.5,1978.6 3859.7,1978.6 3904.6,2023.6 4048.5,2023.6 U4.30@4048.5,1981
U3_87: U3.87 U4.31 | length 1704.6
  Top Layer w10: U3.87@2693.26,2309.69 2949.3,2309.7 v1(3172.04,2086.92) ; v1(3709.27,1835.74) 3966.1,1835.7 4067.5,1937.2 U4.31@4067.5,1981
  Bottom Layer w10: v1(3172.04,2086.92) 3172.04,2051.19 3420.47,1802.76 3676.29,1802.76 v1(3709.27,1835.74)
U3_98: P5.1 U3.98 | length 1108.3
  Top Layer w10: v1(2435.66,2314.09) 2440.3,2314.1 2661.2,2093.1 U3.98@2693.3,2093.1
  Bottom Layer w10: P5.1@2260.5,1695 2260.5,2229.8 2362,2331.3 2418.4,2331.3 v1(2435.66,2314.09)
U3_99: P5.4 U3.99 | length 548.6
  Top Layer w10: v1(2621.1,1940) v1(2696.1,1940) ; v1(2646.1,2075) 2647.6,2073.5 U3.99@2693.26,2073.46
  Bottom Layer w10: P5.4@2560.5,1695 2560.5,1879.4 v1(2621.1,1940) ; v1(2646.1,2075) 2696.1,2025 v1(2696.1,1940)
U4_2: P6.5 U4.2 | length 1536.2
  Top Layer w10: U4.2@3906.5,2496 3949.1,2496 ; 3949.07,2496 4131.68,2313.39 4206.01,2313.39 v1(4341.06,2178.34)
  Bottom Layer w10: v1(4341.06,2178.34) 4387.01,2132.39 4387.01,1674.39 4417.91,1643.49 4465.52,1643.49 4490.5,1668.47 4490.5,1705.77 4522.53,1737.8 4692.7,1737.8 P6.5@4740.5,1690
U4_24: P6.3 U4.24 | length 945.2
  Top Layer w10: U4.24@3906.5,2063 4038.7,2063 v1(4042.95,2067.29)
  Bottom Layer w10: v1(4042.95,2067.29) 4042.95,1894.53 4310.08,1627.4 4477.9,1627.4 P6.3@4540.5,1690
U4_52: P6.6 U4.52 | length 537.1
  Top Layer w10: U4.52@4504.5,2063 4547.1,2063 ; 4547.07,2063 4547.07,1983.43 P6.6@4840.5,1690
U4_74: P6.4 U4.74 | length 1504.8
  Top Layer w10: U4.74@4504.5,2496 4718.2,2496 v1(4770.34,2443.82)
  Bottom Layer w10: P6.4@4640.5,1690 4692.2,1638.3 4757.56,1638.3 4790.5,1671.24 4790.5,1915.33 4965.17,2090 4991.82,2090 5027.25,2125.43 5027.25,2254.5 4991.75,2290 4970.44,2290 4816.62,2443.82 v1(4770.34,2443.82)
U4_80: P4.15 U4.80 | length 1360.3
  Top Layer w10: U4.80@4363.5,2579 4363.5,2621.6 ; 4363.5,2621.57 4459.98,2621.57 v1@4495.45,2657.04
  Bottom Layer w10: v1@4495.45,2657.04 4428.79,2723.7 4428.79,3183.25 4585.54,3340 P4.15@4981.1,3340
  other v1: 4495.45,2657.04
U4_81: P4.14 U4.81 | length 1346.6
  Top Layer w10: 4343.5,2536.4 U4.81@4343.5,2579 ; 4343.5,2536.43 4551.89,2536.43 4665.46,2650 4827.18,2650 4904.04,2726.86 v1(4904.04,2747.68)
  Bottom Layer w10: v1(4904.04,2747.68) 4946.36,2790 4992.85,2790 5027.72,2824.87 5027.72,3059.73 5001.18,3086.27 4973.28,3086.27 4936.08,3123.47 4936.08,3194.98 P4.14@4981.1,3240
U4_84: P4.13 U4.84 | length 1359.9
  Top Layer w10: U4.84@4284.5,2579 4284.5,2621.6 4343.02,2680.13 4457.64,2680.13 4473.73,2696.22 4547.31,2696.22 v1(4554.48,2689.05)
  Bottom Layer w10: v1(4554.48,2689.05) 4554.48,2940.46 4896.99,3282.97 4999.9,3282.97 5028.86,3254.01 5028.86,3187.76 P4.13@4981.1,3140
U4_85: P4.12 U4.85 | length 1048.5
  Top Layer w10: U4.85@4264.5,2579 4264.5,2625.1 4335.6,2696.2 4451,2696.2 4467.1,2712.3 v1(4577.56,2712.31)
  Bottom Layer w10: v1(4577.56,2712.31) 4745.32,2880.07 4745.32,3031.87 4783.62,3070.17 4950.93,3070.17 P4.12@4981.1,3040
U4_86: P4.11 U4.86 | length 961.9
  Top Layer w10: U4.86@4244.5,2579 4244.5,2629.2 4327.6,2712.3 4444.3,2712.3 4467.4,2735.4 v1(4518.15,2735.4) ; v1(4518.43,2814.66) 4855.76,2814.66 P4.11@4981.1,2940
  Bottom Layer w10: v1(4518.15,2735.4) 4518.43,2735.68 v1(4518.43,2814.66)
U4_92: P4.10 U4.92 | length 1314.5
  Top Layer w10: U4.92@4126.5,2579 4126.5,2617.8 4146.6,2637.9 4146.6,2648.2 4238.4,2740 4449.3,2740 4467.7,2758.5 4627.2,2758.5 v1(4642.35,2743.34)
  Bottom Layer w10: v1(4642.35,2743.34) 4761.42,2862.41 4761.42,3024.88 4789.81,3053.27 4833.63,3053.27 4883.69,3003.21 4883.69,2937.41 P4.10@4981.1,2840
U4_93: P4.9 U4.93 | length 1013.9
  Top Layer w10: U4.93@4107.5,2579 4107.5,2621.6 ; 4107.5,2621.57 4129.96,2644.03 4129.96,2655.41 4265.21,2790.66 4930.44,2790.66 P4.9@4981.1,2740
U4_94: P4.8 U4.94 | length 1045
  Top Layer w10: U4.94@4087.5,2579 4087.5,2637 v1(4089.62,2639.15)
  Bottom Layer w10: v1(4089.62,2639.15) 4200.79,2527.98 4869.08,2527.98 P4.8@4981.1,2640
U4_98: P4.6 U4.98 | length 1055.1
  Top Layer w10: 4008.5,2536.4 U4.98@4008.5,2579 ; 4008.5,2536.43 4053.86,2491.07 v1(4438.36,2491.07)
  Bottom Layer w10: v1(4438.36,2491.07) 4930.03,2491.07 P4.6@4981.1,2440
U4_99: P4.5 U4.99 | length 1122.1
  Top Layer w10: U4.99@3989.5,2579 3989.5,2525.1 4046.8,2467.9 v1(4417.73,2467.89)
  Bottom Layer w10: v1(4417.73,2467.89) 4853.21,2467.89 P4.5@4981.1,2340
U4_100: R9.1 U4.100 | length 612.8
  Top Layer w10: R9.1@3510.5,2890 3778.93,2621.57 3969.5,2621.57 ; U4.100@3969.5,2579 3969.5,2621.6
VCC: C2.1 C5.2 C6.2 C7.2 C8.2 C9.2 C10.2 C11.2 C12.2 P2.1 P5.2 P6.1 R8.1 U1.3 U3.10 U3.12 U3.13 U3.19 U3.28 U3.42 U3.54 U3.71 U3.84 U3.96 U4.13 U4.25 U4.33 U4.40 U4.45 U4.63 U4.75 U4.83 U4.90 U4.95 | length 11097.9
  Top Layer w10: P2.1@2066.1,1740 2112.6,1740 2114.11,1741.51 2313.99,1741.51 P5.2@2360.5,1695 ; C7.2@2430.5,3355 2490.5,3415 2590.5,3415 C10.2@2650.5,3475 2671.1,3454.5 U1.3@2938,3454.5 ; U3.96@2693.26,2132.52 2661.4,2132.5 2649.9,2144 2649.9,2363.4 2655.2,2368.7 U3.84@2693.26,2368.74 2796.8,2368.7 2848.5,2420.4 2848.5,2475.4 2833,2490.9 U3.71@2833.02,2587.24 ; 2848.52,2420.45 3167.67,2420.45 3219.38,2368.74 3219.38,2175.33 v1(3196.3,2175.33) ; v1(2946.59,1891.23) 2931.4,1906.4 U3.10@2931.44,1992.76 2931.4,2023.3 2945.3,2037.1 2956.4,2037.1 2970.8,2022.7 U3.12@2970.82,1992.76 U3.13@2990.5,1992.76 ; v1(3012.27,1909.56) 3059.7,1909.6 3108.6,1958.5 U3.19@3108.61,1992.76 ; 3167.7,2420.4 U3.54@3167.67,2587.24 ; 3219.4,2175.3 3219.4,2125.5 3251.7,2093.1 3287.7,2093.1 3399.4,2093.1 3412.7,2079.8 3458.1,2079.8 3543.2,1994.7 3814.7,1994.7 3863.9,2044 U4.25@3906.5,2044 4087.1,2044 4107.5,2023.6 U4.33@4107.5,1981 ; 3219.4,2368.7 U3.42@3287.74,2368.74 ; U4.13@3906.5,2280 4206.8,2280 4331.5,2155.3 4339.1,2155.3 ; v1(3977.76,2710.48) 3991.5,2710.48 4066.53,2635.45 4066.53,2622.54 4067.5,2621.57 ; 4067.5,2536.4 4067.5,2557.7 U4.95@4067.5,2579 4067.5,2621.6 ; 4067.5,2536.43 4162.47,2536.43 4166.5,2540.46 4170.53,2536.43 4303.5,2536.43 4323.93,2516 4461.93,2516 4461.93,2280 4461.93,2266.56 4350.63,2155.26 4339.1,2155.26 4339.1,2023.57 ; 4107.5,2023.57 4244.5,2023.57 v1@4286.84,2023.57 ; 4166.5,2540.5 U4.90@4166.5,2579 ; U4.40@4244.5,1981 4244.5,2023.6 ; v1(4286.84,2030.87) v1@4286.84,2023.57 ; 4303.5,2536.4 U4.83@4303.5,2579 ; U4.45@4343.5,1981 4343.5,2023.6 ; 4343.5,2023.57 4339.1,2023.57 ; 4461.9,2280 U4.63@4504.5,2280 ; 4461.9,2516 U4.75@4504.5,2516 ; v1@4286.84,2023.57 4339.1,2023.57
  Bottom Layer w10: P2.1@2066.1,1740 2180,1626.1 2789.3,1626.1 2947.6,1784.5 v1@2947.6,1890.2 ; P5.2@2360.5,1695 2360.5,1940 R8.1@2485.5,2065 ; C8.2@2430.5,3235 C7.2@2430.5,3355 C6.2@2430.5,3475 C5.2@2430.5,3595 ; C12.2@2650.5,3235 C11.2@2650.5,3355 C10.2@2650.5,3475 C9.2@2650.5,3595 3451.69,3595 3534.37,3677.68 3556.34,3677.68 3676.13,3557.89 C2.1@3676.13,3175 3977.76,2873.37 v1(3977.76,2710.48) ; v1(2946.59,1891.23) v1@2947.62,1890.2 ; v1(3196.3,2175.33) 3196.3,2166.6 3012.27,1982.57 v1(3012.27,1909.56) 2966.98,1909.56 v1@2947.62,1890.2 ; v1(4286.84,2030.87) 4340.5,1977.2 P6.1@4340.5,1690
X1: C13.2 U3.22 X1.1 | length 546.3
  Top Layer w10: U3.22@3167.67,1992.76 3167.7,1946.7 3181.6,1932.8 3414.9,1932.8 X1.1@3456.1,1973.94 ; X1.1@3456.1,1973.94 3490.04,1940 C13.2@3631.1,1940
X2: C14.2 U3.23 X1.2 | length 607.4
  Top Layer w10: U3.23@3187.35,1992.76 3187.4,1960.5 3199,1948.9 3294.2,1948.9 v1(3301.67,1956.28) ; X1.2@3456.1,2166.06 3461.71,2160.45 3626.55,2160.45 C14.2@3631.1,2165
  Bottom Layer w10: v1(3301.67,1956.28) 3301.67,2011.63 X1.2@3456.1,2166.06